# Altium PCB PCBTest.PcbDoc
Units mm, origin at the board's own origin, x right, y up, seen from the top; angles counter-clockwise.
Board outline 236.22 x 127 mm, 2 copper layers (Top Layer, Bottom Layer); 37 components, 37 nets, 146 pads, 6 vias.
Unrouted connection lines stored in the file: 3.
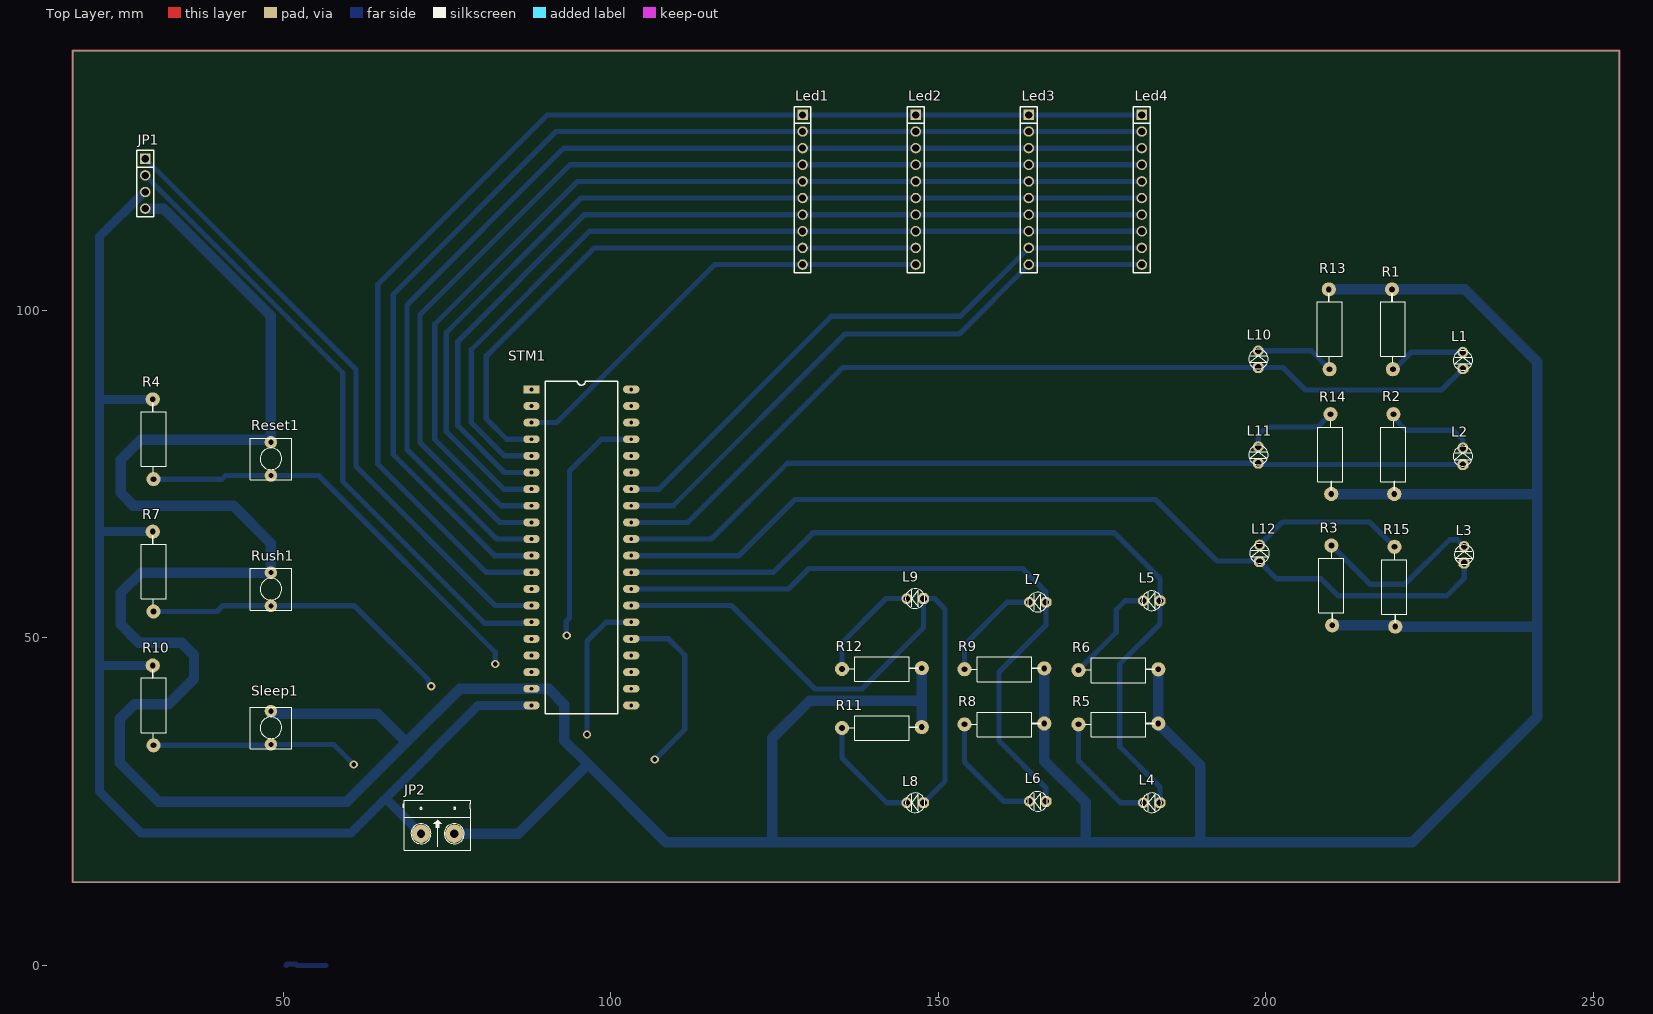
[diagram p0: Top Layer view]
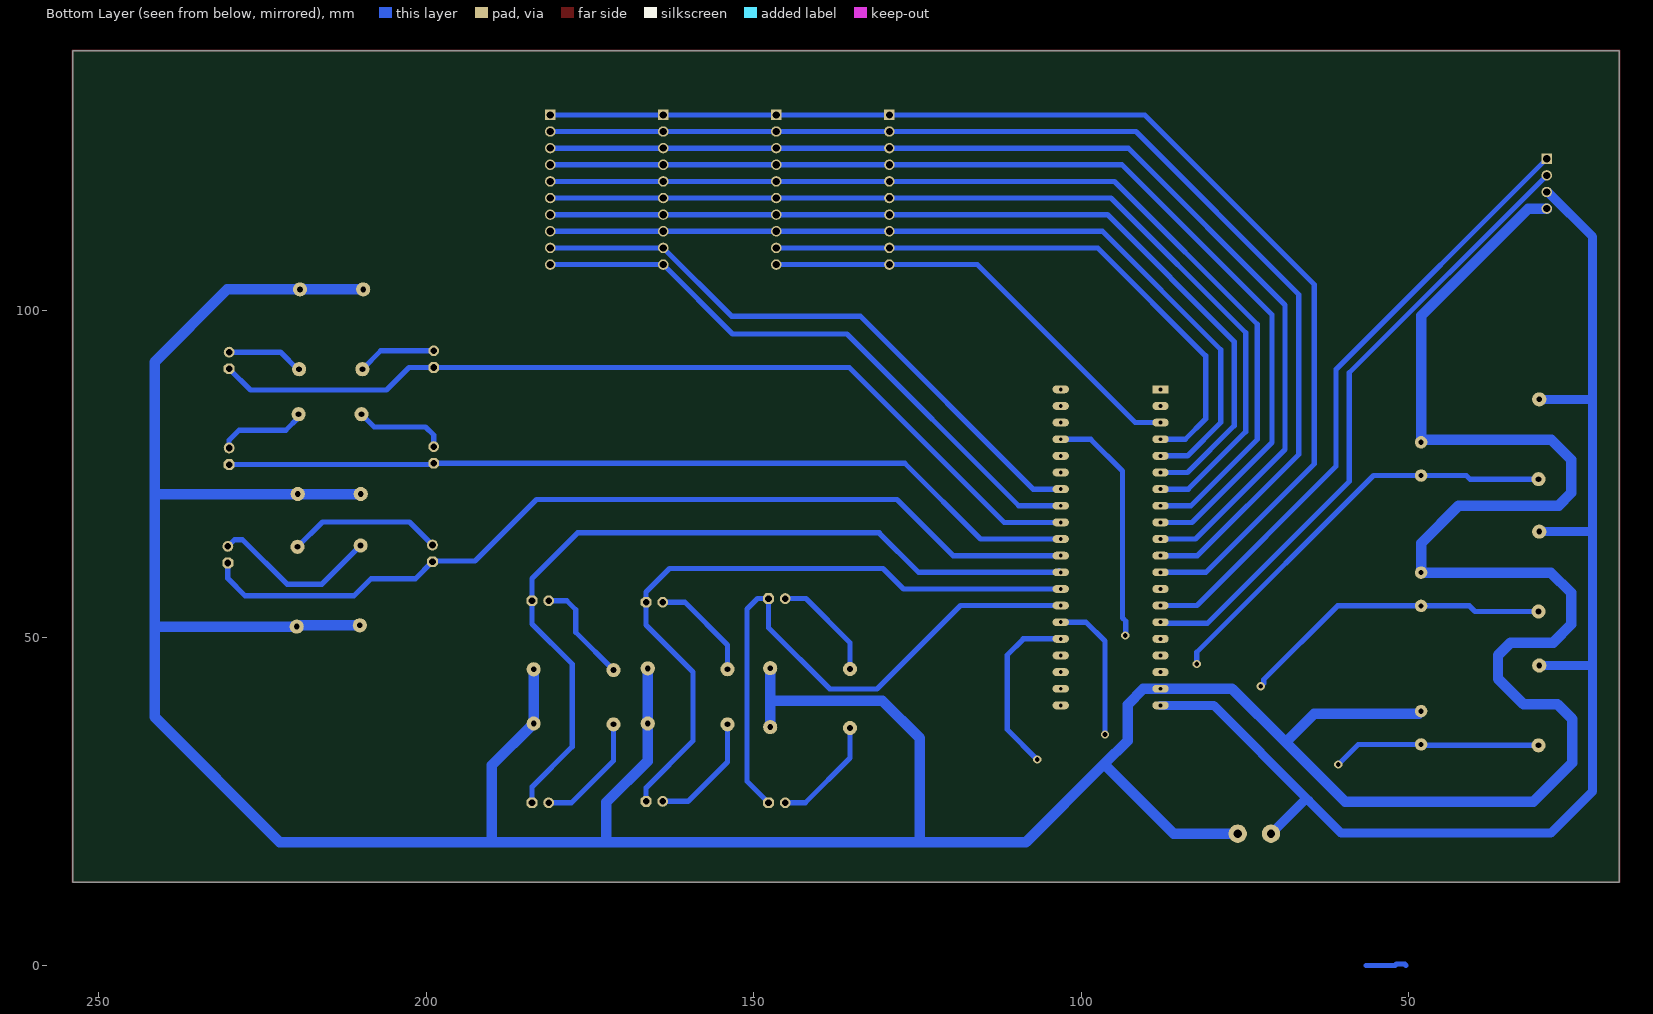
[diagram p1: Bottom Layer view, seen from below]
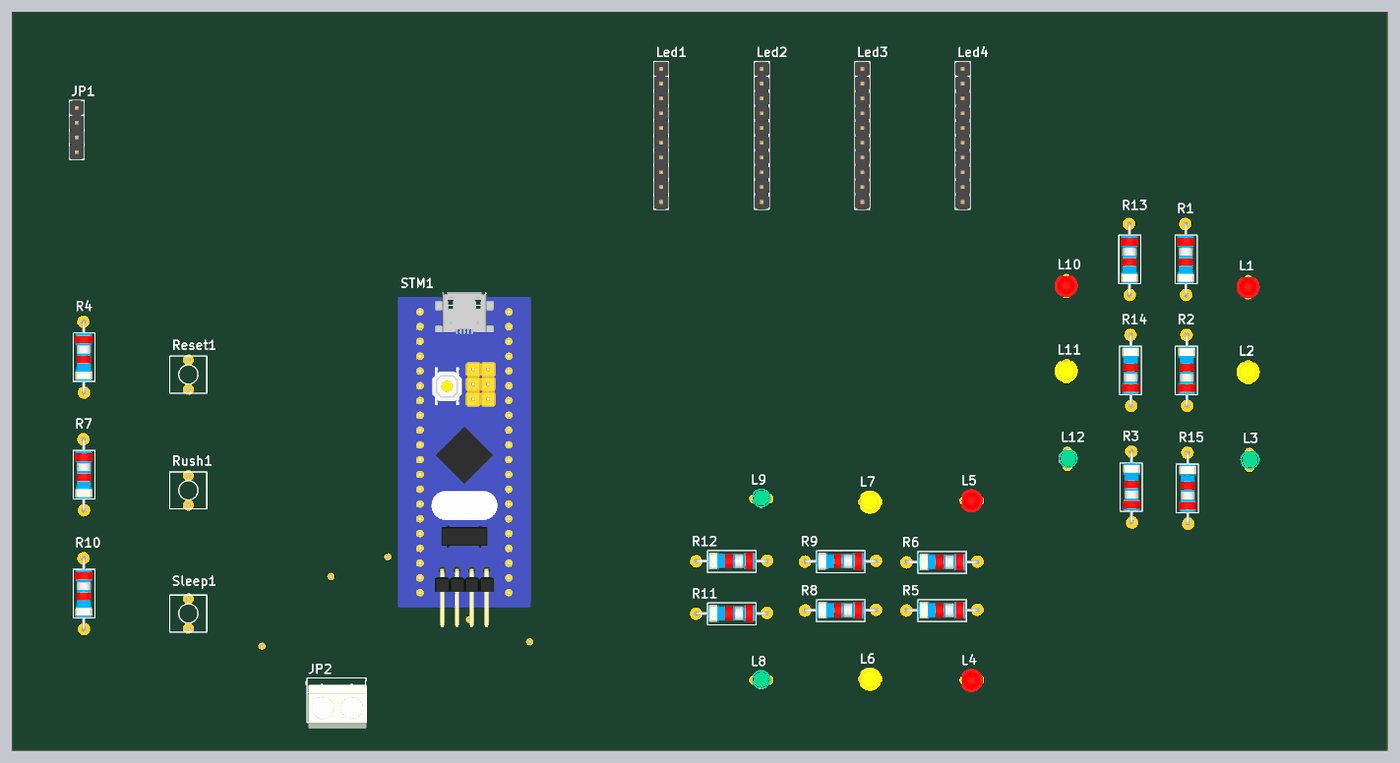
[diagram p2: 3D render of the assembled board from above, using the file's embedded part models]

## Layer stack, top to bottom
Top Solder: solder mask 0.0102, Solder Resist, Dk 3.5
Top Layer: signal copper 0.0356
Dielectric 1: dielectric 0.32, FR-4, Dk 4.8
Bottom Layer: signal copper 0.0356
Bottom Solder: solder mask 0.0102, Solder Resist, Dk 3.5

## Board outline
17.78,12.7 254,12.7 254,139.7 17.78,139.7

## Design rules (kind name [scope] priority, off if disabled: settings)
Clearance [All] p1: gap=0.4
PolygonConnect [All] p1: connectstyle=Relief reliefconductorwidth=0.254 reliefentries=4 polygonreliefangle="90 Angle" airgapwidth=0.254
RoutingLayers [All] p1: top layer_v5=FALSE bottom layer_v5=TRUE
RoutingVias [All] p1: holewidth=0.711 width=1.27 viastyle="Through Hole" minholewidth=0.711 minwidth=1.27 maxholewidth=0.711 maxwidth=1.27
SolderMaskExpansion [All] p1: expansion=0.102
Width GND [InNet('GND')] p1: maxlimit=1.6 minlimit=1.6 preferedwidth=1.6
Width VCC [InNet('VCC')] p2: maxlimit=1.4 minlimit=1.4 preferedwidth=1.4
Width Net [All] p3: maxlimit=0.8 minlimit=0.8 preferedwidth=0.8
29 further rules are at their usual default settings.

## Components (designator, comment, footprint, x,y, rotation, side; value= is the part's Value field where it differs from the comment)
JP1 "JP 1x4 2.54" "JP 1x4 DT" 28.889,123.178 r270 top
JP2 "Header 2_1" HED2 70.994,20.109 r0 top
L1 "LED 3mm" LED-3MM-RED 230.088,91.102 r90 top
L2 "LED 3mm" LED-3MM-YELLOW 230.088,76.474 r90 top
L3 "LED 3mm" LED-3MM-GREEN 230.28,61.446 r90 top
L4 "LED 3mm" LED-3MM-RED 183.838,24.828 r180 top
L5 "LED 3mm" LED-3MM-RED 183.838,55.682 r180 top
L6 "LED 3mm" LED-3MM-YELLOW 166.418,25.046 r180 top
L7 "LED 3mm" LED-3MM-YELLOW 166.418,55.464 r180 top
L8 "LED 3mm" LED-3MM-GREEN 147.718,24.828 r180 top
L9 "LED 3mm" LED-3MM-GREEN 147.718,56.009 r180 top
L10 "LED 3mm" LED-3MM-RED 198.851,91.305 r90 top
L11 "LED 3mm" LED-3MM-YELLOW 198.851,76.677 r90 top
L12 "LED 3mm" LED-3MM-GREEN 199.043,61.649 r90 top
Led1 "JP 1x10 2.54" "JP 1x10 DT" 129.268,129.875 r270 top
Led2 "JP 1x10 2.54" "JP 1x10 DT" 146.532,129.875 r270 top
Led3 "JP 1x10 2.54" "JP 1x10 DT" 163.797,129.875 r270 top
Led4 "JP 1x10 2.54" "JP 1x10 DT" 181.061,129.875 r270 top
R1 "Res" RES-1/2W 219.401,97.642 r270 top
R2 "Res" RES-1/2W 219.48,77.561 r90 top
R3 "Res" RES-1/2W 210.005,57.517 r90 top
R4 "Res" RES-1/2W 30.155,80.849 r270 top
R5 "Res" RES-1/2W 177.996,36.809 r180 top
R6 "Res" RES-1/2W 177.996,45.089 r180 top
R7 "Res" RES-1/2W 30.155,60.643 r270 top
R8 "Res" RES-1/2W 160.576,36.809 r180 top
R9 "Res" RES-1/2W 160.576,45.227 r180 top
R10 "Res" RES-1/2W 30.155,40.208 r270 top
R11 "Res" RES-1/2W 141.876,36.259 r180 top
R12 "Res" RES-1/2W 141.876,45.257 r180 top
R13 "Res" RES-1/2W 209.737,97.642 r270 top
R14 "Res" RES-1/2W 209.862,77.561 r90 top
R15 "Res" RES-1/2W 219.642,57.314 r90 top
Reset1 "SW" SW2 48.069,79.881 r270 top
Rush1 "SW" SW2 48.069,59.981 r270 top
Sleep1 "SW" SW2 48.069,38.819 r270 top
STM1 "KIT STM32F103C8T6" "STM32F103 KIT" 87.86,87.965 r0 top

## Footprints (in the part's own frame and the unit in brackets; to place one, negate y for a bottom-side part, rotate by r counter-clockwise, add the part's x,y. Pads: shape width x height; smd on the part's side, far side on the other; paste and mask are expansions set on the pad)
HED2 [mil] "Header 2, 2 pin, hight 300mil, Pin to Pin 200, Colour Green"
  round 110 hole 50: 1(0,0) 2(200,0)
  silkscreen extent -106,-100 300,200, body extent -92,-140 302,155, height 394
"JP 1x4 DT" [mm] "4 pins, 1 row, straight, gold plating"
  rect 1.6x1.6 hole 1.1: 1(0,0)
  round 1.6 hole 1.1: 2(2.54,0) 3(5.08,0) 4(7.62,0)
  silkscreen extent -1.27,-1.27 8.89,1.27, body extent -1.27,-1.27 8.89,1.27, height 8.54
"JP 1x10 DT" [mm] "10 pins, 1 row, straight, gold plating"
  rect 1.6x1.6 hole 1.1: 1(0,0)
  round 1.6 hole 1.1: 2(2.54,0) 3(5.08,0) 4(7.62,0) 5(10.16,0) 6(12.7,0) 7(15.24,0) 8(17.78,0) 9(20.32,0) 10(22.86,0)
  silkscreen extent -1.27,-1.27 24.13,1.27, body extent -1.27,-1.27 24.13,1.27, height 8.54
LED-3MM-GREEN [mil]
  oct 65x65 hole 40: 1(0,0)
  round 65 hole 40: 2(100,0)
  silkscreen extent -9,-59 109,59, body extent -15,-70 112,60, height 182
LED-3MM-RED [mil]
  oct 65x65 hole 40: 1(0,0)
  round 65 hole 40: 2(100,0)
  silkscreen extent -9,-59 109,59, body extent -27,-77 117,80, height 181
LED-3MM-YELLOW [mil]
  oct 65x65 hole 40: 1(0,0)
  round 65 hole 40: 2(100,0)
  silkscreen extent -9,-59 109,59, body extent -27,-77 117,80, height 181
RES-1/2W [mil]
  round 85 hole 35: 1(-220,-5) 2(260,0)
  silkscreen extent -195,-74 221,75, body extent -230,-60 270,56, height 121
"STM32F103 KIT" [mm]
  rect 2.5x1.2 hole 0.6: 1(0,0)
  oval 2.5x1.2 hole 0.6: 2(0,-2.54) 3(0,-5.08) 4(0,-7.62) 5(0,-10.16) 6(0,-12.7) 7(0,-15.24) 8(0,-17.78) 9(0,-20.32) 10(0,-22.86) 11(0,-25.4) 12(0,-27.94) 13(0,-30.48) 14(0,-33.02) 15(0,-35.56) 16(0,-38.1) 17(0,-40.64) 18(0,-43.18) 19(0,-45.72) 20(0,-48.26) 21(15.24,-48.26) 22(15.24,-45.72) 23(15.24,-43.18) 24(15.24,-40.64) 25(15.24,-38.1) 26(15.24,-35.56) 27(15.24,-33.02) 28(15.24,-30.48) 29(15.24,-27.94) 30(15.24,-25.4) 31(15.24,-22.86) 32(15.24,-20.32) 33(15.24,-17.78) 34(15.24,-15.24) 35(15.24,-12.7) 36(15.24,-10.16) 37(15.24,-7.62) 38(15.24,-5.08) 39(15.24,-2.54) 40(15.24,0)
  silkscreen extent 2.09,-49.53 13.16,1.27, body extent -3.81,-53.97 19.05,3.59, height 16.12
SW2 [mil] "SW button 2pin, 250x 250 mil"
  round 75 hole 31: 1(0,0) 2(200,0)
  silkscreen extent -25,-125 225,125

## Part data
JP1: library part "JP 1x4 2.54 Duc Thang", "C?m"
JP2: "Header, 2-Pin"
L1 L4 L5 L10: library part "LED 3mm Do", "C?m"
L2 L6 L7 L11: library part "LED 3mm Vang", "C?m"
L3 L8 L9 L12: library part "LED 3mm Xanh La", "C?m"
Led1 Led2 Led3 Led4: library part "JP 1x10 2.54 Duc Thang", "C?m"
Reset1 Rush1 Sleep1: library part SW2, "Switch button 2 pin"
STM1: library part "STM32f103 Bluepill", "KIT STM32F103C8T6 Bluepill"

## Via types
v1: diameter 1.27, hole 0.711, Top Layer to Bottom Layer, 6 vias

## Nets (pads, with @x,y where several pads share a name; then routed paths per layer and width w, separated by ;. In a path a pad name is that pad's centre, name@x,y a point inside that pad or via, vN(x,y) a via of type N, cw(c..) or ccw(c..) an arc to the next point about the centre after c; other vN are vias at no path point)
0: Led1.8 Led2.8 Led3.8 Led4.8 STM1.5 | length 132.3
  Bottom Layer w0.8: STM1.5 83.757,77.805 78.656,82.906 78.656,94.01 96.741,112.095 Led1.8 Led2.8 Led3.8 Led4.8
1: Led1.7 Led2.7 Led3.7 Led4.7 STM1.6 | length 139.5
  Bottom Layer w0.8: STM1.6 83.762,75.265 76.615,82.412 76.615,95.287 95.963,114.635 Led1.7 Led2.7 Led3.7 Led4.7
2: Led1.6 Led2.6 Led3.6 Led4.6 STM1.7 | length 146.5
  Bottom Layer w0.8: STM1.7 83.63,72.725 74.85,81.505 74.85,96.6 95.425,117.175 Led1.6 Led2.6 Led3.6 Led4.6
3: Led1.5 Led2.5 Led3.5 Led4.5 STM1.8 | length 153.6
  Bottom Layer w0.8: STM1.8 83.206,70.185 73.085,80.306 73.085,97.913 94.887,119.715 Led1.5 Led2.5 Led3.5 Led4.5
4: Led1.4 Led2.4 Led3.4 Led4.4 STM1.9 | length 161.3
  Bottom Layer w0.8: STM1.9 83.048,67.645 70.824,79.869 70.824,99.345 93.734,122.255 Led1.4 Led2.4 Led3.4 Led4.4
5: Led1.3 Led2.3 Led3.3 Led4.3 STM1.10 | length 168.9
  Bottom Layer w0.8: STM1.10 82.505,65.105 68.838,78.772 68.838,100.848 92.785,124.795 Led1.3 Led2.3 Led3.3 Led4.3
6: Led1.2 Led2.2 Led3.2 Led4.2 STM1.11 | length 176.6
  Bottom Layer w0.8: STM1.11 82.196,62.565 66.75,78.011 66.75,102.453 91.632,127.335 Led1.2 Led2.2 Led3.2 Led4.2
7: Led1.1 Led2.1 Led3.1 Led4.1 STM1.12 | length 185.1
  Bottom Layer w0.8: STM1.12 80.94,60.025 64.386,76.579 64.386,103.988 90.273,129.875 Led1.1 Led2.1 Led3.1 Led4.1
EN0: Led3.10 Led4.10 STM1.33 | length 93.2
  Bottom Layer w0.8: STM1.33 109.506,70.185 135.739,96.418 153.2,96.418 Led3.10 Led4.10
EN1: Led3.9 Led4.9 STM1.34 | length 93.2
  Bottom Layer w0.8: STM1.34 107.313,72.725 133.724,99.136 153.378,99.136 Led3.9 Led4.9
EN2: Led1.10 Led2.10 STM1.3 | length 68.7
  Bottom Layer w0.8: STM1.3 91.725,82.885 115.855,107.015 Led1.10 Led2.10
EN3: Led1.9 Led2.9 STM1.4 | length 90.2
  Bottom Layer w0.8: STM1.4 84.088,80.345 80.973,83.46 80.973,93.079 97.449,109.555 Led1.9 Led2.9
G2: L8.1 L9.1 STM1.27 | length 93.1
  Bottom Layer w0.8: STM1.27 118.415,54.945 131.152,42.208 138.36,42.208 147.718,51.566 L9.1 149.387,56.009 151,54.396 151,28.11 L8.1
GND: JP1.4 JP2.2 R1.1 R2.1 R3.1 R5.1 R6.1 R8.1 R9.1 R11.1 R12.1 R13.1 R14.1 R15.1 Reset1.1 Rush1.1 Sleep1.1 STM1.19 | length 728.3
  Bottom Layer w1.6: JP1.4 31.706,115.558 48.069,99.195 Reset1.1 47.673,80.277 28.218,80.277 25.137,77.196 25.137,72.169 27.083,70.223 42.328,70.223 48.069,64.482 Rush1.1 28.244,59.981 25.137,56.874 25.137,52.059 27.894,49.302 34.381,49.302 36.328,47.355 36.328,43.788 32.435,39.895 27.246,39.895 24.975,37.624 24.975,30.976 30.976,24.975 59.681,24.975 68.763,34.057 ; Sleep1.1 48.452,38.436 64.384,38.436 68.763,34.057 ; JP2.2 85.846,20.109 96.437,30.7 96.437,30.782 ; R11.1 147.464,40.431 130.327,40.431 124.592,34.696 124.592,18.813 ; 147.464,40.554 R12.1 ; R9.1 R8.1 166.164,31.206 172.47,24.9 172.47,18.813 ; R6.1 R5.1 189.955,30.565 189.955,19.362 189.406,18.813 ; R13.1 R1.1 230.368,103.23 241.481,92.117 241.481,71.682 ; R14.1 R2.1 241.19,71.973 241.481,71.682 ; R3.1 219.566,51.929 R15.1 241.203,51.726 241.481,51.448 ; 68.763,34.057 76.951,42.245 STM1.19 90.476,42.245 92.895,39.826 92.895,34.324 96.437,30.782 ; 96.437,30.782 108.406,18.813 124.592,18.813 ; 124.592,18.813 172.47,18.813 ; 172.47,18.813 189.406,18.813 ; 189.406,18.813 222.345,18.813 241.481,37.949 241.481,51.448 ; 241.481,51.448 241.481,71.682
NetJP1_1: JP1.1 STM1.14 | length 95.9
  Bottom Layer w0.8: JP1.1 61.054,91.013 61.054,76.209 82.318,54.945 STM1.14
NetJP1_2: JP1.2 STM1.15 | length 97.1
  Bottom Layer w0.8: JP1.2 59.034,90.493 59.034,73.906 80.701,52.239 87.694,52.239 STM1.15
NetL1_1: L1.1 L10.1 STM1.32 | length 139.6
  Bottom Layer w0.8: STM1.32 111.733,67.645 135.393,91.305 L10.1 202.61,91.305 206.06,87.855 226.841,87.855 L1.1
NetL1_2: L1.2 R1.2 | length 11.8
  Bottom Layer w0.8: R1.2 219.659,91.038 222.263,93.642 L1.2
NetL2_1: L2.1 L11.1 STM1.31 | length 131.9
  Bottom Layer w0.8: STM1.31 115.358,65.105 126.93,76.677 L11.1 199.054,76.474 L2.1
NetL2_2: L2.2 R2.2 | length 13.7
  Bottom Layer w0.8: R2.2 219.48,83.686 221.441,81.725 228.562,81.725 230.088,80.199 L2.2
NetL3_1: L3.1 L12.1 STM1.30 | length 140.3
  Bottom Layer w0.8: STM1.30 119.544,62.565 128.117,71.138 183.161,71.138 192.566,61.733 198.959,61.733 L12.1 201.649,59.043 208.41,59.043 211.02,56.433 227.646,56.433 230.28,59.067 L3.1
NetL3_2: L3.2 R3.2 | length 26
  Bottom Layer w0.8: R3.2 215.914,58.212 221.26,58.212 228.052,65.004 229.262,65.004 L3.2
NetL4_2: L4.2 R5.2 | length 18.1
  Bottom Layer w0.8: R5.2 171.392,31.249 177.813,24.828 L4.2
NetL5_2: L5.2 R6.2 | length 16.3
  Bottom Layer w0.8: R6.2 177.167,50.864 177.167,54.307 178.542,55.682 L5.2
NetL6_2: L6.2 R8.2 | length 18.1
  Bottom Layer w0.8: R8.2 153.972,31.075 160.001,25.046 L6.2
NetL7_2: L7.2 R9.2 | length 16.3
  Bottom Layer w0.8: R9.2 153.972,48.932 160.504,55.464 L7.2
NetL8_2: L8.2 R11.2 | length 17.3
  Bottom Layer w0.8: R11.2 135.272,31.678 142.122,24.828 L8.2
NetL9_2: L9.2 R12.2 | length 16.7
  Bottom Layer w0.8: R12.2 135.272,49.271 142.01,56.009 L9.2
NetL10_2: L10.2 R13.2 | length 12
  Bottom Layer w0.8: L10.2 206.93,93.845 R13.2
NetL11_2: L11.2 R14.2 | length 14.1
  Bottom Layer w0.8: L11.2 198.851,80.989 200.092,82.23 207.927,82.23 R14.2
NetL12_2: L12.2 R15.2 | length 23.6
  Bottom Layer w0.8: L12.2 202.565,67.711 215.849,67.711 R15.2
R2: L4.1 L5.1 STM1.29 | length 125.8
  Bottom Layer w0.8: STM1.29@103.36,60.285 STM1.29 124.804,60.025 130.83,66.051 176.87,66.051 183.838,59.083 L5.1 183.838,52.143 177.7,46.005 177.7,33.404 183.838,27.266 L4.1
RESET: R4.2 Reset1.2 STM1.37 | length 102.2
  Bottom Layer w0.8: R4.2 40.614,74.245 41.17,74.801 Reset1.2 55.346,74.801 82.322,47.825 v1(82.322,46.017) ; v1(93.268,50.365) 93.183,50.45 93.183,52.542 93.67,53.029 93.67,75.483 98.532,80.345 STM1.37
RUSH: R7.2 Rush1.2 STM1.26 | length 70.4
  Bottom Layer w0.8: R7.2 39.838,54.039 40.7,54.901 Rush1.2 60.845,54.901 72.097,43.649 72.097,43.09 v1(72.563,42.624) ; v1(96.346,35.256) 96.346,49.526 99.225,52.405 STM1.26
SLEEP: R10.2 Sleep1.2 STM1.25 | length 58.9
  Bottom Layer w0.8: R10.2 47.934,33.604 Sleep1.2 57.664,33.739 v1(60.718,30.685) ; STM1.25 108.81,49.865 111.269,47.406 111.269,36.001 v1(106.699,31.431)
VCC: JP1.3 JP2.1 R4.1 R7.1 R10.1 STM1.20 | length 203.7
  Bottom Layer w1.4: JP1.3 28.742,118.098 21.886,111.242 21.886,86.367 ; R10.1 21.886,45.796 ; R7.1 22.324,66.231 21.886,66.669 ; R4.1 21.956,86.437 21.886,86.367 ; JP2.1 65.947,25.156 65.212,25.156 ; STM1.20 79.761,39.705 65.212,25.156 ; 21.886,45.796 21.886,66.669 ; 21.886,45.796 21.886,26.601 28.284,20.203 60.259,20.203 65.212,25.156 ; 21.886,66.669 21.886,86.367
Y2: L6.1 L7.1 STM1.28 | length 104.2
  Bottom Layer w0.8: STM1.28@103.1,57.635 STM1.28 127.097,57.485 130.236,60.624 162.829,60.624 166.418,57.035 L7.1 166.418,51.983 159.238,44.803 159.238,34.293 166.418,27.113 L6.1
pads on no net: STM1.1 STM1.2 STM1.13 STM1.16 STM1.17 STM1.18 STM1.21 STM1.22 STM1.23 STM1.24 STM1.35 STM1.36 STM1.38 STM1.39 STM1.40
copper on no net: | length 732.7
  Top Layer w0.254: 17.78,12.7 17.78,139.7 254,139.7 254,12.7 17.78,12.7
  Bottom Layer w0.8: 50.359,0 50.584,0.225 51.824,0.225 52.049,0 56.443,0